# Altium PCB adio.PCBDOC
Units mil, origin at the board's own origin, x right, y up, seen from the top; angles counter-clockwise.
Board outline 7500 x 3500 mil, 2 copper layers (Top Layer, Bottom Layer); 27 components, 82 nets, 332 pads, 4 vias.
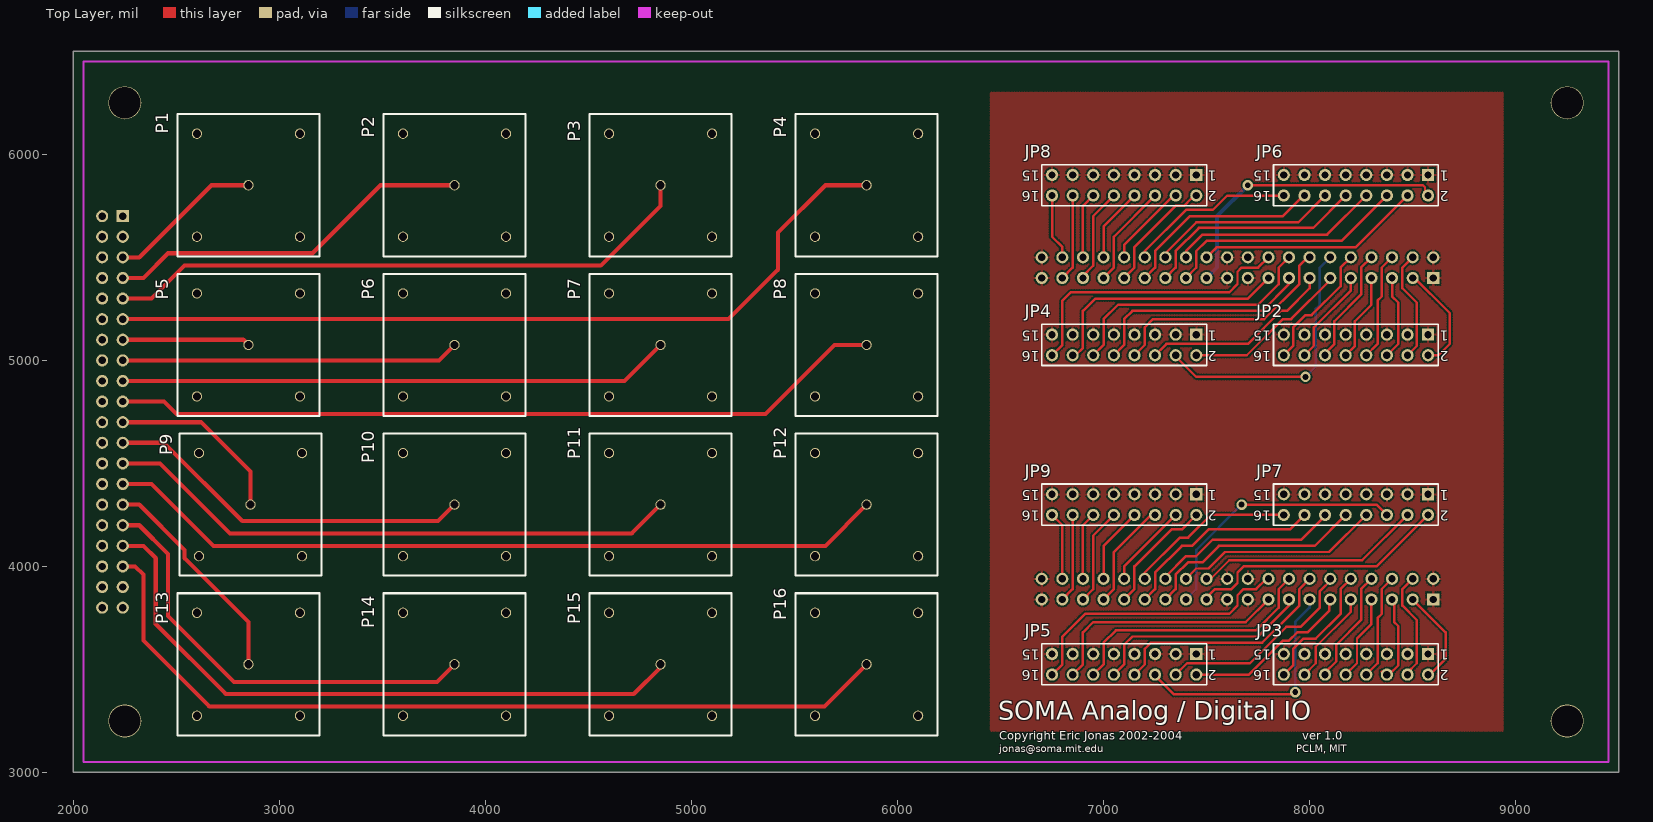
[diagram p0: Top Layer view]
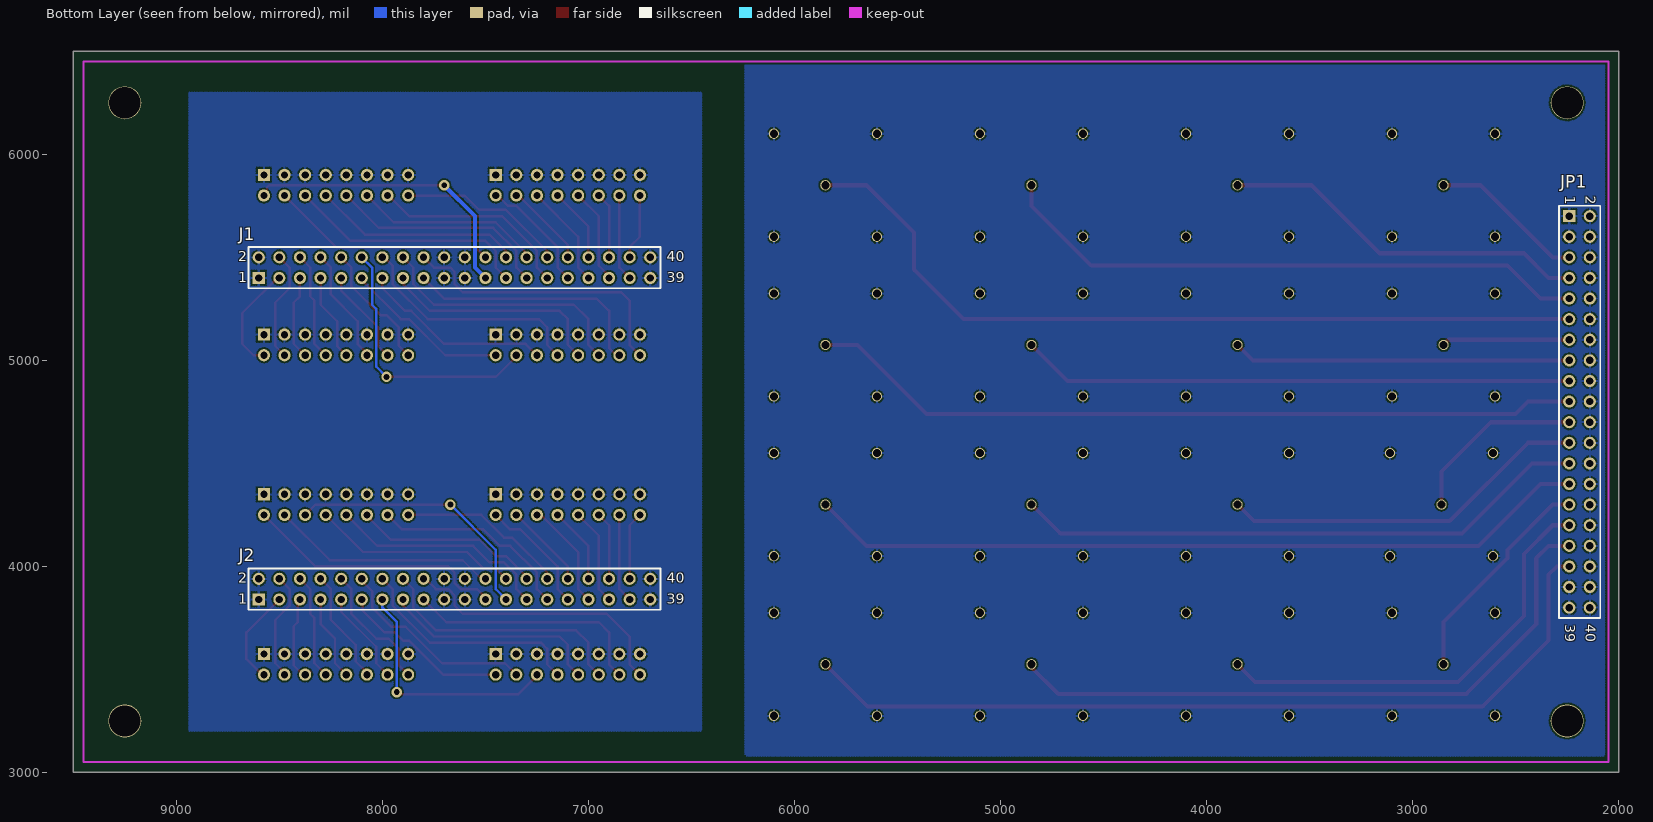
[diagram p1: Bottom Layer view, seen from below]

## Layer stack, top to bottom
Top Layer: signal copper 1.4
Dielectric: dielectric 12.6, FR-4, Dk 4.8
Bottom Layer: signal copper 1.4

## Board outline
2000,3000 9500,3000 9500,6500 2000,6500

## Design rules (kind name [scope] priority, off if disabled: settings)
Clearance [All] p1: gap=8
ComponentClearance [All] p1: gap=10 collisioncheckmode=0
PolygonConnect [All] p1: connectstyle=Relief reliefconductorwidth=10 reliefentries=4 polygonreliefangle="90 Angle"
RoomDefinition analog [InComponentClass('analog')] p1: confinementstyle=ConfineIn formatcopy=TRUE outline 9500,3120 2200,3120 2200,5420 9500,5420
RoutingLayers [All] p1: top layer=Horizontal bottom layer=Vertical
RoutingVias [All] p1: holewidth=28 width=50 viastyle="Through Hole" minholewidth=28 minwidth=50 maxholewidth=28 maxwidth=50
SolderMaskExpansion [All] p1: expansion=4
TestPointUsage [All] p1: valid=0 allowmultiple=FALSE
Testpoint [All] p1: side=15 testpointundercomponent=TRUE minsize=40 maxsize=100 preferedsize=60 minholesize=0 maxholesize=40 preferedholesize=32 testpointgrid=1 style=1023 order=-539222988
Width [All] p1: maxlimit=100 minlimit=8 preferedwidth=8 toplayer_prefwidth=12 bottomlayer_prefwidth=12 minimp=50.000000 maximp=50.000000 favimp=50.000000
16 further rules are at their usual default settings.

## Components (designator, comment, footprint, x,y, rotation, side; value= is the part's Value field where it differs from the comment)
J1 "40-pin header" HDR2X20 8600,5400 r180 bottom
J2 "40-pin header" HDR2X20 8600,3840 r180 bottom
JP1 "Header 20X2" HDR2X20 2240,5700 r270 bottom
JP2 "Header 8X2" HDR2X8 8575,5125 r180 top
JP3 "Header 8X2" HDR2X8 8575,3575 r180 top
JP4 "Header 8X2" HDR2X8 7450,5125 r180 top
JP5 "Header 8X2" HDR2X8 7450,3575 r180 top
JP6 "Header 8X2" HDR2X8 8575,5900 r180 top
JP7 "Header 8X2" HDR2X8 8575,4350 r180 top
JP8 "Header 8X2" HDR2X8 7450,5900 r180 top
JP9 "Header 8X2" HDR2X8 7450,4350 r180 top
P1 "BNC" "Vertical BNC 227699-1" 2850,5850 r0 top
P2 "BNC" "Vertical BNC 227699-1" 3850,5850 r0 top
P3 "BNC" "Vertical BNC 227699-1" 4850,5850 r0 top
P4 "BNC" "Vertical BNC 227699-1" 5850,5850 r0 top
P5 "BNC" "Vertical BNC 227699-1" 2850,5075 r0 top
P6 "BNC" "Vertical BNC 227699-1" 3850,5075 r0 top
P7 "BNC" "Vertical BNC 227699-1" 4850,5075 r0 top
P8 "BNC" "Vertical BNC 227699-1" 5850,5075 r0 top
P9 "BNC" "Vertical BNC 227699-1" 2860,4300 r0 top
P10 "BNC" "Vertical BNC 227699-1" 3850,4300 r0 top
P11 "BNC" "Vertical BNC 227699-1" 4850,4300 r0 top
P12 "BNC" "Vertical BNC 227699-1" 5850,4300 r0 top
P13 "BNC" "Vertical BNC 227699-1" 2850,3525 r0 top
P14 "BNC" "Vertical BNC 227699-1" 3850,3525 r0 top
P15 "BNC" "Vertical BNC 227699-1" 4850,3525 r0 top
P16 "BNC" "Vertical BNC 227699-1" 5850,3525 r0 top

## Footprints (in the part's own frame and the unit in brackets; to place one, negate y for a bottom-side part, rotate by r counter-clockwise, add the part's x,y. Pads: shape width x height; smd on the part's side, far side on the other; paste and mask are expansions set on the pad)
HDR2X8 [mm]
  rect 1.5x1.5 hole 0.9: 1(0,0)
  round 1.5 hole 0.9: 2(0,2.54) 3(2.54,0) 4(2.54,2.54) 5(5.08,0) 6(5.08,2.54) 7(7.62,0) 8(7.62,2.54) 9(10.16,0) 10(10.16,2.54) 11(12.7,0) 12(12.7,2.54) 13(15.24,0) 14(15.24,2.54) 15(17.78,0) 16(17.78,2.54)
  silkscreen extent -1.27,-1.27 19.05,3.81
HDR2X20 [mm]
  rect 1.5x1.5 hole 0.9: 1(0,0)
  round 1.5 hole 0.9: 2(0,2.54) 3(2.54,0) 4(2.54,2.54) 5(5.08,0) 6(5.08,2.54) 7(7.62,0) 8(7.62,2.54) 9(10.16,0) 10(10.16,2.54) 11(12.7,0) 12(12.7,2.54) 13(15.24,0) 14(15.24,2.54) 15(17.78,0) 16(17.78,2.54) 17(20.32,0) 18(20.32,2.54) 19(22.86,0) 20(22.86,2.54) 21(25.4,0) 22(25.4,2.54) 23(27.94,0) 24(27.94,2.54) 25(30.48,0) 26(30.48,2.54) 27(33.02,0) 28(33.02,2.54) 29(35.56,0) 30(35.56,2.54) 31(38.1,0) 32(38.1,2.54) 33(40.64,0) 34(40.64,2.54) 35(43.18,0) 36(43.18,2.54) 37(45.72,0) 38(45.72,2.54) 39(48.26,0) 40(48.26,2.54)
  silkscreen extent -1.27,-1.27 49.53,3.81
"Vertical BNC 227699-1" [mil] "AMP vertical BNC 227699-1"
  round 50 hole 40: 1(0,0) 2(-250,-250) 2(-250,250) 2(250,-250) 2(250,250)
  silkscreen extent -345,-345 345,345

## Part data
J1 J2: library part 40PINHEADER, "Simple 40pin connector"
JP1: "Header, 20-Pin, Dual row"
JP2 JP3 JP4 JP5 JP6 JP7 JP8 JP9: "Header, 8-Pin, Dual row"
P1 P2 P3 P4 P5 P6 P7 P8 P9 P10 P11 P12 P13 P14 P15 P16: "BNC Elbow Connector"

## Free pads (board coordinates)
  round 160 hole 152: 0(2250,3250) 0(2250,6250) 0(9250,3250) 0(9250,6250)

## Via types
v1: diameter 50, hole 28, Top Layer to Bottom Layer, 4 vias

## Nets (pads, with @x,y where several pads share a name; then routed paths per layer and width w, separated by ;. In a path a pad name is that pad's centre, name@x,y a point inside that pad or via, vN(x,y) a via of type N, cw(c..) or ccw(c..) an arc to the next point about the centre after c; other vN are vias at no path point)
ADIO0: JP1.5 P1.1 | length 755
  Top Layer w20: JP1.5 2320,5500 2670,5850 P1.1
ADIO1: JP1.7 P2.1 | length 1796.4
  Top Layer w20: JP1.7 2340,5400 2460,5520 3160,5520 3490,5850 P2.1
ADIO2: JP1.9 P3.1 | length 2896.4
  Top Layer w20: JP1.9 2380,5300 2540,5460 4560,5460 4850,5750 P3.1
ADIO3: JP1.11 P4.1 | length 3984.7
  Top Layer w20: JP1.11 5180,5200 5420,5440 5420,5620 5650,5850 P4.1
ADIO4: JP1.13 P5.1 | length 620.4
  Top Layer w20: JP1.13 2825,5100 P5.1
ADIO5: JP1.15 P6.1 | length 1641.1
  Top Layer w20: JP1.15 3775,5000 P6.1
ADIO6: JP1.17 P7.1 | length 2682.5
  Top Layer w20: JP1.17 4675,4900 P7.1
ADIO7: JP1.19 P8.1 | length 3773.6
  Top Layer w20: JP1.19 2440,4800 2500,4740 5360,4740 5695,5075 P8.1
ADIO8: JP1.21 P9.1 | length 879.4
  Top Layer w20: JP1.21 2620,4700 2860,4460 P9.1
ADIO9: JP1.23 P10.1 | length 1800.5
  Top Layer w20: JP1.23 2440,4600 2820,4220 3770,4220 P10.1
ADIO10: JP1.25 P11.1 | length 2808.8
  Top Layer w20: JP1.25 2420,4500 2760,4160 4710,4160 P11.1
ADIO11: JP1.27 P12.1 | length 3817.1
  Top Layer w20: JP1.27 2380,4400 2680,4100 5650,4100 P12.1
ADIO12: JP1.29 P13.1 | length 1074.5
  Top Layer w20: JP1.29 2320,4300 2540,4080 2540,4040 2850,3730 P13.1
ADIO13: JP1.31 P14.1 | length 2135.7
  Top Layer w20: JP1.31 2320,4200 2460,4060 2460,3760 2780,3440 3765,3440 P14.1
ADIO14: JP1.33 P15.1 | length 3149.5
  Top Layer w20: JP1.33 2340,4100 2400,4040 2400,3720 2740,3380 4720,3380 P15.1@4850,3510
ADIO15: JP1.35 P16.1 | length 4164
  Top Layer w20: JP1.35 2300,4000 2340,3960 2340,3640 2660,3320 5645,3320 P16.1
AGND: JP1.1 JP1.2 JP1.3 JP1.4 JP1.6 JP1.8 JP1.10 JP1.12 JP1.14 JP1.16 JP1.18 JP1.20 JP1.22 JP1.24 JP1.26 JP1.28 JP1.30 JP1.32 JP1.34 JP1.36 JP1.37 JP1.38 JP1.39 JP1.40 P1.2 P2.2 P3.2 P4.2 P5.2 P6.2 P7.2 P8.2 P9.2 P10.2 P11.2 P12.2 P13.2 P14.2 P15.2 P16.2
DGND: J1.1 J1.2 J1.19 J1.20 J1.21 J1.22 J1.39 J1.40 J2.1 J2.2 J2.19 J2.20 J2.21 J2.22 J2.39 J2.40 JP2.1 JP2.3 JP2.5 JP2.7 JP2.9 JP2.11 JP2.13 JP2.15 JP3.1 JP3.3 JP3.5 JP3.7 JP3.9 JP3.11 JP3.13 JP3.15 JP4.1 JP4.3 JP4.5 JP4.7 JP4.9 JP4.11 JP4.13 JP4.15 JP5.1 JP5.3 JP5.5 JP5.7 JP5.9 JP5.11 JP5.13 JP5.15 JP6.1 JP6.3 JP6.5 JP6.7 JP6.9 JP6.11 JP6.13 JP6.15 JP7.1 JP7.3 JP7.5 JP7.7 JP7.9 JP7.11 JP7.13 JP7.15 JP8.1 JP8.3 JP8.5 JP8.7 JP8.9 JP8.11 JP8.13 JP8.15 JP9.1 JP9.3 JP9.5 JP9.7 JP9.9 JP9.11 JP9.13 JP9.15
NetJ1_3: J1.3 JP2.2 | length 532.3
  Top Layer w12: J1.3@8500,5410 8680,5230 8680,5080 8625,5025 JP2.2
NetJ1_4: J1.4 JP2.4 | length 543.3
  Top Layer w12: JP2.4 8520,5070 8520,5280 8450,5350 8450,5450 J1.4
NetJ1_5: J1.5 JP2.6 | length 410.2
  Top Layer w12: JP2.6 8430,5080 8430,5280 8400,5310 J1.5
NetJ1_6: J1.6 JP2.8 | length 540.9
  Top Layer w12: JP2.8 8330,5080 8330,5290 8350,5310 8350,5450 J1.6@8410,5510
NetJ1_7: J1.7 JP2.10 | length 436.8
  Top Layer w12: JP2.10@8185,5025 JP2.10 8220,5070 8220,5190 8300,5270 J1.7
NetJ1_8: J1.8 JP2.12 | length 579.4
  Top Layer w12: JP2.12@8060,5020 8120,5080 8120,5190 8250,5320 8250,5450 J1.8
NetJ1_9: J1.9 JP2.14 | length 468.2
  Top Layer w12: JP2.14 8020,5070 8020,5160 8200,5340 J1.9
NetJ1_10: J1.10 JP2.16 | length 634.3
  Top Layer w12: JP2.16@7870,5020 7920,5070 7920,5160 7980,5220 8010,5220 8150,5360 8150,5450 J1.10
NetJ1_11: J1.11 JP4.2 | length 811.2
  Top Layer w12: JP4.2 7695,5025 7870,5200 7910,5200 8100,5390 J1.11
NetJ1_12: J1.12 JP4.4 | length 1315.3
  Top Layer w12: JP4.4@7340,5030 7450,4920 v1(7980,4920)
  Bottom Layer w12: v1(7980,4920) 8030,4970 8030,5250 8050,5270 8050,5450 J1.12
NetJ1_13: J1.13 JP4.6 | length 948.8
  Top Layer w12: JP4.6@7240,5015 7305,5080 7700,5080 7860,5240 7890,5240 8000,5350 J1.13
NetJ1_14: J1.14 JP4.8 | length 1144.3
  Top Layer w12: JP4.8@7145,5025 JP4.8 7200,5075 7200,5160 7240,5200 7780,5200 7950,5370 7950,5460 J1.14@7990,5500
NetJ1_15: J1.15 JP4.10 | length 1086.1
  Top Layer w12: JP4.10 7100,5075 7100,5200 7140,5240 7770,5240 7900,5370 J1.15@7900,5390
NetJ1_16: J1.16 JP4.12 | length 1281.8
  Top Layer w12: JP4.12@6935,5025 JP4.12 7000,5075 7000,5200 7070,5270 7750,5270 7850,5370 7850,5450 J1.16
NetJ1_17: J1.17 JP4.14 | length 1200.8
  Top Layer w12: JP4.14@6845,5025 JP4.14 ; JP4.14@6865,5025 6900,5060 6900,5240 6960,5300 7700,5300 J1.17
NetJ1_18: J1.18 JP4.16 | length 1407.8
  Top Layer w12: JP4.16 6800,5075 6800,5290 6840,5330 7610,5330 7650,5370 7650,5430 7670,5450 7750,5450 J1.18
NetJ1_23: J1.23 JP6.2 | length 1437
  Top Layer w12: v1(7700,5850) 8550,5850 8560,5840 JP6.2@8560,5800
  Bottom Layer w20: J1.23 7550,5450 7550,5700 v1(7700,5850)
NetJ1_24: J1.24 JP6.4 | length 1099.3
  Top Layer w12: J1.24 7550,5550 8225,5550 JP6.4
NetJ1_25: J1.25 JP6.6 | length 1192.5
  Top Layer w12: J1.25 7450,5450 7450,5530 7500,5580 8155,5580 JP6.6 JP6.6@8375,5795
NetJ1_26: J1.26 JP6.8 | length 1031.8
  Top Layer w12: J1.26 7400,5530 7480,5610 8085,5610 JP6.8
  Bottom Layer w20: JP6.8@8275,5785 JP6.8
NetJ1_27: J1.27 JP6.10 | length 1087.5
  Top Layer w12: J1.27 7350,5450 7350,5530 7462.85,5642.85 8017.85,5642.85 JP6.10
NetJ1_28: J1.28 JP6.12 | length 914.5
  Top Layer w12: J1.28 7300,5520 7450,5670 7945,5670 JP6.12 ; JP6.12@8077.5,5797.5 JP6.12@8080,5800
NetJ1_29: J1.29 JP6.14 | length 987.5
  Top Layer w12: J1.29 7250,5450 7250,5530 7420,5700 7870,5700 7970,5800 JP6.14
NetJ1_30: J1.30 JP6.16 | length 816.8
  Top Layer w12: J1.30 7200,5530 7400,5730 7530,5730 7600,5800 JP6.16
NetJ1_31: J1.31 JP8.2 | length 584.3
  Top Layer w12: J1.31 7150,5450 7150,5550 7350,5750 7390,5750 7425.45,5785.45 7435.45,5785.45 JP8.2 ; JP8.2@7430,5790 JP8.2@7440,5790
NetJ1_32: J1.32 JP8.4 | length 429.4
  Top Layer w12: J1.32 7100,5560 7340,5800 JP8.4@7360,5800 ; JP8.4@7350,5790 JP8.4
NetJ1_33: J1.33 JP8.6 | length 503.6
  Top Layer w12: J1.33 7050,5450 7050,5600 JP8.6
NetJ1_34: J1.34 JP8.8 | length 372.1
  Top Layer w12: J1.34 7000,5650 JP8.8 JP8.8@7150,5790
NetJ1_35: J1.35 JP8.10 | length 462.1
  Top Layer w12: J1.35 6900,5410 6950,5460 6950,5700 JP8.10
NetJ1_36: J1.36 JP8.12 | length 320.7
  Top Layer w12: J1.36 6900,5750 JP8.12
NetJ1_37: J1.37 JP8.14 | length 434.9
  Top Layer w12: J1.37 6850,5450 JP8.14 JP8.14@6840,5790
NetJ1_38: J1.38 JP8.16 | length 320.7
  Top Layer w12: JP8.16 6750,5600 6800,5550 J1.38
NetJ2_3: J2.3 JP3.2 | length 472.3
  Top Layer w12: J2.3 8660,3680 8660,3550 8585,3475 JP3.2
NetJ2_4: J2.4 JP3.4 | length 533.3
  Top Layer w12: JP3.4 8475,3485 8520,3530 8520,3740 8450,3810 8450,3890 J2.4
NetJ2_5: J2.5 JP3.6 | length 411.9
  Top Layer w12: JP3.6@8350,3490 JP3.6@8370,3490 ; JP3.6 8385,3475 8430,3520 8430,3710 8410,3730 J2.5@8410,3830
NetJ2_6: J2.6 JP3.8 | length 526.8
  Top Layer w12: JP3.8@8275,3485 JP3.8 8330,3530 8330,3750 8350,3770 8350,3890 J2.6
NetJ2_7: J2.7 JP3.10 | length 416.8
  Top Layer w12: JP3.10 8230,3530 8230,3650 8300,3720 J2.7
NetJ2_8: J2.8 JP3.12 | length 558.2
  Top Layer w12: JP3.12 8075,3485 8130,3540 8130,3620 8250,3740 8250,3890 J2.8
NetJ2_9: J2.9 JP3.14 | length 458.2
  Top Layer w12: JP3.14 8030,3530 8030,3610 8200,3780 J2.9
NetJ2_10: J2.10 JP3.16 | length 634.8
  Top Layer w12: JP3.16 7920,3520 7920,3600 7970,3650 8030,3650 8150,3770 8150,3890 J2.10
NetJ2_11: J2.11 JP5.2 | length 830.5
  Top Layer w12: JP5.2 7705,3475 7870,3640 7900,3640 7940,3680 7990,3680 8094.27,3784.27 8094.27,3834.27 J2.11
NetJ2_12: J2.12 JP5.4 | length 999.5
  Top Layer w12: JP5.4 7405,3530 7710,3530 7886.58,3706.58 7956.58,3706.58 8050,3800 8050,3880 J2.12@8110,3940
NetJ2_13: J2.13 JP5.6 | length 1214.6
  Top Layer w12: JP5.6@7240,3480 7340,3380 7920,3380 v1(7930,3390)
  Bottom Layer w12: v1(7930,3390) 7930,3730 8000,3800 J2.13
NetJ2_14: J2.14 JP5.8 | length 1133.4
  Top Layer w12: JP5.8 7200,3525 7200,3600 7230,3630 7770,3630 7950,3810 7950,3890 J2.14
NetJ2_15: J2.15 JP5.10 | length 1074.4
  Top Layer w12: JP5.10 7100,3525 7100,3620 7140,3660 7750,3660 7900,3810 J2.15
NetJ2_16: J2.16 JP5.12 | length 1256.8
  Top Layer w12: JP5.12 7000,3525 7000,3630 7060,3690 7740,3690 7850,3800 7850,3890 J2.16
NetJ2_17: J2.17 JP5.14 | length 1192
  Top Layer w12: JP5.14 6900,3525 6900,3680 6950,3730 7690,3730 J2.17
NetJ2_18: J2.18 JP5.16 | length 1351
  Top Layer w12: JP5.16 6800,3525 6800,3660 6910,3770 7610,3770 7650,3810 7650,3860 7680,3890 7740,3890 7790,3940 J2.18
NetJ2_23: J2.23 JP7.2 | length 1284.1
  Top Layer w12: J2.23@7490,3840 7540,3890 7620,3890 7650,3920 7650,3970 7680,4000 8325,4000 JP7.2
NetJ2_24: J2.24 JP7.4 | length 1113.4
  Top Layer w12: J2.24@7490,3940 7520,3940 7610,4030 8255,4030 JP7.4
NetJ2_25: J2.25 JP7.6 | length 1297.5
  Top Layer w12: v1(7670,4300) 8325,4300 JP7.6
  Bottom Layer w12: J2.25 7450,3890 7450,4080 v1(7670,4300)
NetJ2_26: J2.26 JP7.8 | length 1003.4
  Top Layer w12: J2.26 7450,3990 7510,3990 7590,4070 8095,4070 JP7.8
NetJ2_27: J2.27 JP7.10 | length 1085.8
  Top Layer w12: J2.27 7350,3890 7350,3960 7410,4020 7480,4020 7560,4100 8025,4100 JP7.10
NetJ2_28: J2.28 JP7.12 | length 900.1
  Top Layer w12: J2.28 7300,3950 7400,4050 7450,4050 7530,4130 7960,4130 JP7.12@8070,4240
NetJ2_29: J2.29 JP7.14 | length 991.7
  Top Layer w12: J2.29 7250,3890 7250,3970 7380,4100 7430,4100 7510,4180 7905,4180 JP7.14
NetJ2_30: J2.30 JP7.16 | length 821
  Top Layer w12: J2.30 7200,3970 7370,4140 7410,4140 7520,4250 JP7.16
NetJ2_31: J2.31 JP9.2 | length 584.3
  Top Layer w12: J2.31 7150,3890 7150,4000 7330,4180 7380,4180 JP9.2
NetJ2_32: J2.32 JP9.4 | length 413.6
  Top Layer w12: J2.32 7100,4000 JP9.4
NetJ2_33: J2.33 JP9.6 | length 539.4
  Top Layer w12: J2.33 7050,3890 7050,4070 7240,4260 JP9.6@7260,4260
NetJ2_34: J2.34 JP9.8 | length 372.1
  Top Layer w12: J2.34 7000,4100 JP9.8
NetJ2_35: J2.35 JP9.10 | length 472.1
  Top Layer w12: J2.35 6950,3890 6950,4150 JP9.10
NetJ2_36: J2.36 JP9.12 | length 330.7
  Top Layer w12: J2.36 6900,4200 JP9.12
NetJ2_37: J2.37 JP9.14 | length 440.7
  Top Layer w12: J2.37 6850,3890 JP9.14@6850,4260
NetJ2_38: J2.38 JP9.16 | length 330.7
  Top Layer w12: JP9.16 6800,4200 J2.38

## Polygon pours and split planes (outlines as drawn)
DGND on Top Layer (hatched 90Degree grid 8 track 8, remove dead copper): 6450,6250 6450,3200 8940,3200 8940,6300 6450,6300
DGND on Bottom Layer (hatched 90Degree grid 8 track 8, remove dead copper): 6450,6300 8940,6300 8940,3200 6450,3200
AGND on Bottom Layer (hatched 90Degree grid 8 track 8, remove dead copper): 2060,6440 2060,3080 6240,3080 6240,6440

## Keep-outs
Keep-Out Layer:
  lines w10: 2050,3050 9450,3050 9450,6450 2050,6450 2050,3050

## Silkscreen, mask and mechanical layers (free items; w line width, h text height)
Top Overlay:
  text "SOMA Analog / Digital IO" at 6490,3256 h90
  text "Copyright Eric Jonas 2002-2004" at 6494,3160 h40
  text "ver 1.0" at 7964,3160 h40
  text "jonas@soma.mit.edu" at 6494,3098 h35
  text "PCLM, MIT" at 7934,3098 h35
Drill Drawing:
  text ".LEGEND" at 9700,3200 h60
  text "Drill Drawing." at 9700,3100 h60

## Dimensions
2050,3050 to 9450,3050 on Mechanical 1
2050,3050 to 2050,6450 on Mechanical 1

## Text inside footprints (layer, text, board x,y; h text height)
J1: Bottom Overlay "1" at 8700,5380 h50; Bottom Overlay "2" at 8700,5480 h50; Bottom Overlay "40" at 6620,5480 h50; Bottom Overlay "39" at 6620,5380 h50
J2: Bottom Overlay "1" at 8700,3820 h50; Bottom Overlay "2" at 8700,3920 h50; Bottom Overlay "40" at 6620,3920 h50; Bottom Overlay "39" at 6620,3820 h50
JP1: Bottom Overlay "1" at 2260,5800 h50 r90; Bottom Overlay "2" at 2160,5800 h50 r90; Bottom Overlay "40" at 2160,3720 h50 r90; Bottom Overlay "39" at 2260,3720 h50 r90
JP2: Top Overlay "16" at 7815,5045 h50 r180; Top Overlay "15" at 7815,5145 h50 r180; Top Overlay "1" at 8675,5145 h50 r180; Top Overlay "2" at 8675,5045 h50 r180
JP3: Top Overlay "16" at 7815,3495 h50 r180; Top Overlay "15" at 7815,3595 h50 r180; Top Overlay "1" at 8675,3595 h50 r180; Top Overlay "2" at 8675,3495 h50 r180
JP4: Top Overlay "16" at 6690,5045 h50 r180; Top Overlay "15" at 6690,5145 h50 r180; Top Overlay "1" at 7550,5145 h50 r180; Top Overlay "2" at 7550,5045 h50 r180
JP5: Top Overlay "16" at 6690,3495 h50 r180; Top Overlay "15" at 6690,3595 h50 r180; Top Overlay "1" at 7550,3595 h50 r180; Top Overlay "2" at 7550,3495 h50 r180
JP6: Top Overlay "2" at 8675,5820 h50 r180; Top Overlay "1" at 8675,5920 h50 r180; Top Overlay "15" at 7815,5920 h50 r180; Top Overlay "16" at 7815,5820 h50 r180
JP7: Top Overlay "16" at 7815,4270 h50 r180; Top Overlay "15" at 7815,4370 h50 r180; Top Overlay "1" at 8675,4370 h50 r180; Top Overlay "2" at 8675,4270 h50 r180
JP8: Top Overlay "16" at 6690,5820 h50 r180; Top Overlay "15" at 6690,5920 h50 r180; Top Overlay "1" at 7550,5920 h50 r180; Top Overlay "2" at 7550,5820 h50 r180
JP9: Top Overlay "16" at 6690,4270 h50 r180; Top Overlay "15" at 6690,4370 h50 r180; Top Overlay "1" at 7550,4370 h50 r180; Top Overlay "2" at 7550,4270 h50 r180